# EAGLE board esc_board (EAGLE 9.2.2)
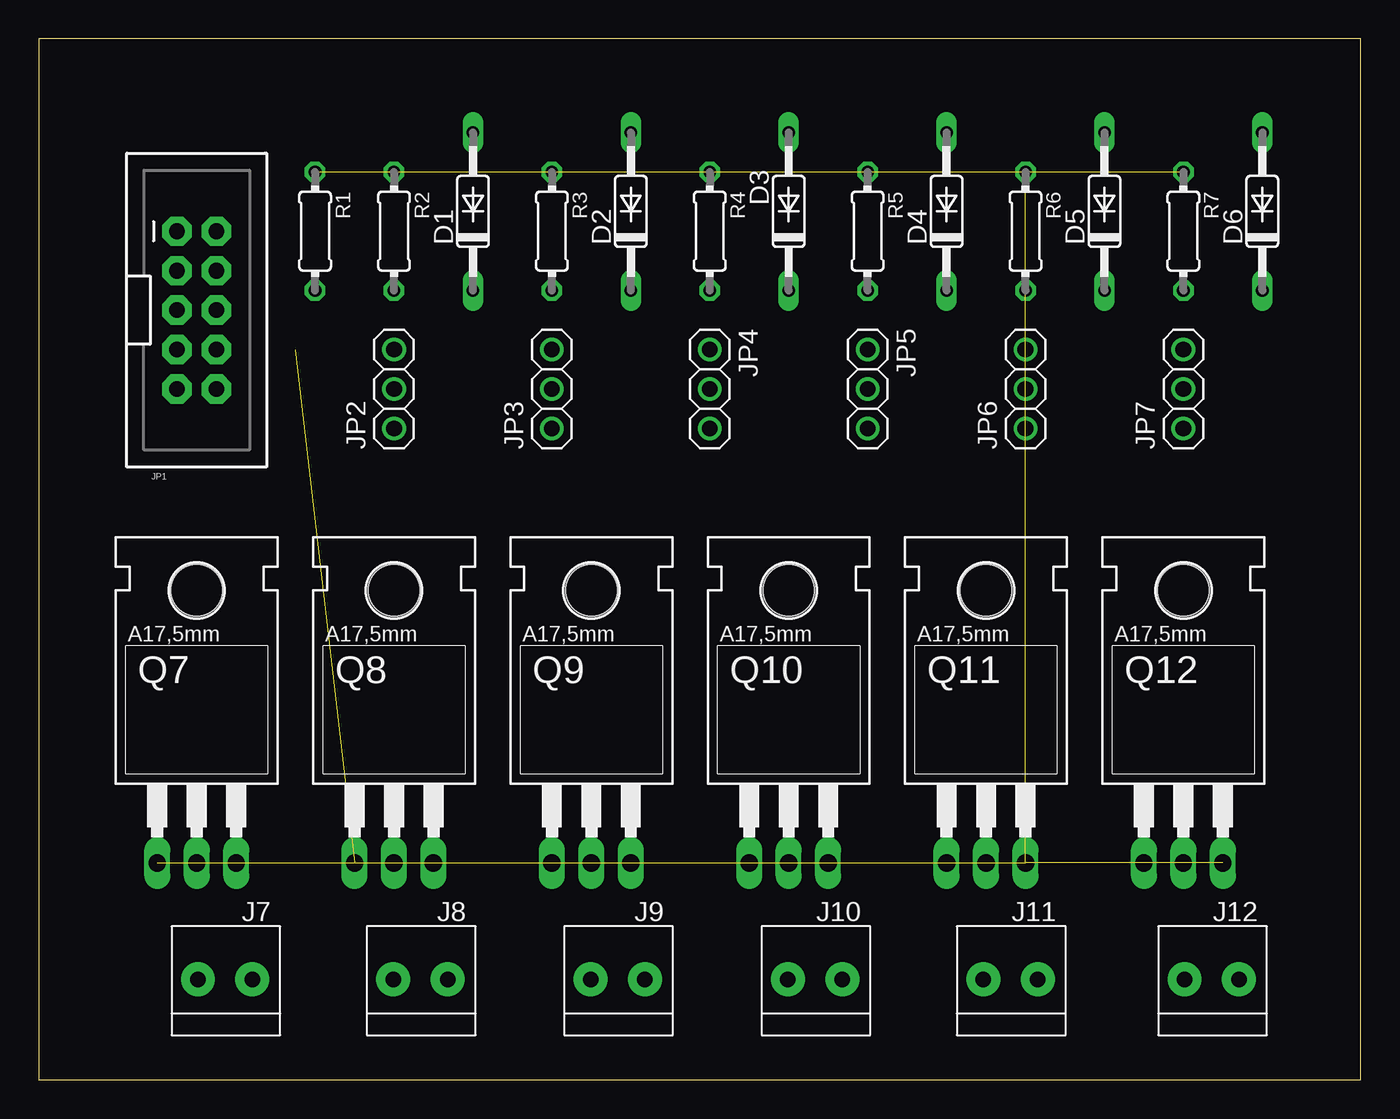
[diagram p0: board, top side]
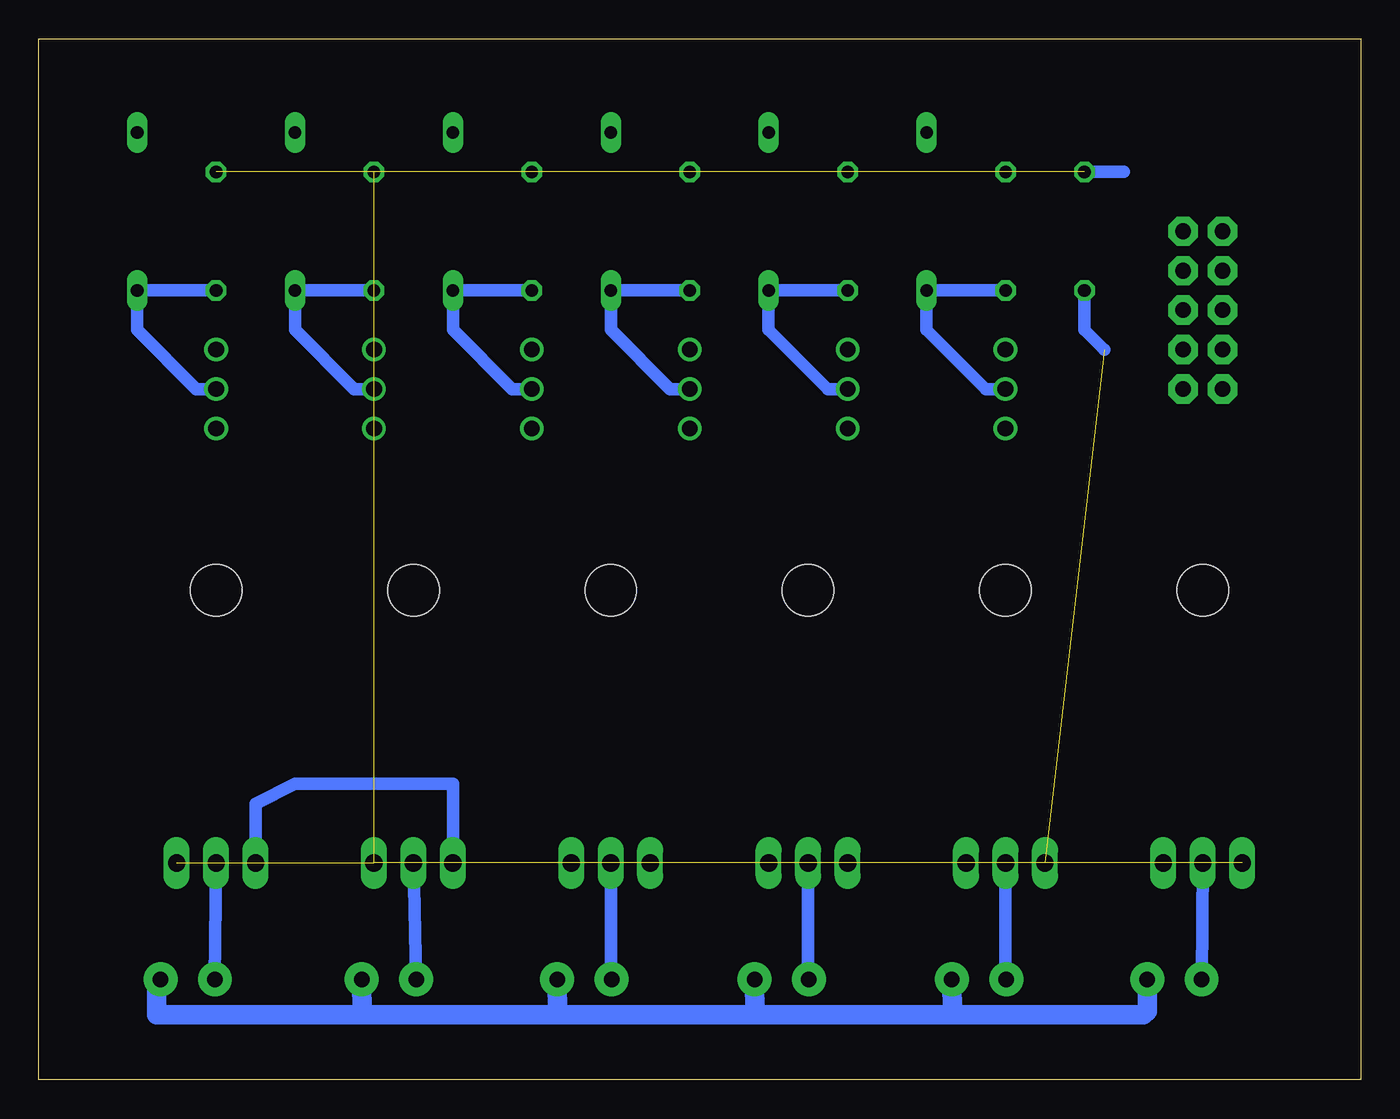
[diagram p1: board, bottom side, seen from below]

Size 85.07 x 66.98 mm. Coordinates in mm from the lower left corner, seen from the top.
Outline: 0,0 85.07,0 85.07,66.98 0,66.98 0,0
Copper layers (1*16): Top 0.035mm / dielectric 1.5mm / Bottom 0.035mm
Design rules "default": minimum track width 6mil, minimum drill 0.35mm, track to track 6mil, track to pad 6mil, pad to pad 6mil, via to via 6mil, smd to smd 6mil, copper to edge 40mil, drill to drill 6mil, minimum pad ring 10mil, minimum via ring 8mil, stop-mask expansion 4mil, vias tented up to drill 0mil, thermal gap 10mil

## Footprints (pad centres in the part's own frame; a part is rotated, then mirrored left to right if it is on the bottom)
DO35-10 = drill 0.813 long: A 5.08,0; C -5.08,0
1X2-3.5MM = drill 1 pad 2.184: 1 1.8,0; 2 -1.7,0
2X5-SHROUDED = drill 1.016 pad 1.88 octagon: 1 -1.27,5.08; 2 1.27,5.08; 3 -1.27,2.54; 4 1.27,2.54; 5 -1.27,0; 6 1.27,0; 7 -1.27,-2.54; 8 1.27,-2.54; 9 -1.27,-5.08; 10 1.27,-5.08
1X03 = drill 1.016: 1 -2.54,0; 2 0,0; 3 2.54,0
TO220BH = drill 1.118 long: D 0,-6.35; G -2.54,-6.35; S 2.54,-6.35 | hole 3.302: 0,11.176
0204/7 = drill 0.813 octagon: 1 -3.81,0; 2 3.81,0

## Placement (x,y rotation side)
D1  1N4148DO35-10  [DO35-10]  27.94,55.88 90 top
D2  1N4148DO35-10  [DO35-10]  38.1,55.88 90 top
D3  1N4148DO35-10  [DO35-10]  48.26,55.88 90 top
D4  1N4148DO35-10  [DO35-10]  58.42,55.88 90 top
D5  1N4148DO35-10  [DO35-10]  68.58,55.88 90 top
D6  1N4148DO35-10  [DO35-10]  78.74,55.88 90 top
J7  1X2-3.5MM  [1X2-3.5MM]  11.94,6.48 0 top
J8  1X2-3.5MM  [1X2-3.5MM]  24.51,6.48 0 top
J9  1X2-3.5MM  [1X2-3.5MM]  37.21,6.48 0 top
J10  1X2-3.5MM  [1X2-3.5MM]  49.91,6.48 0 top
J11  1X2-3.5MM  [1X2-3.5MM]  62.48,6.48 0 top
J12  1X2-3.5MM  [1X2-3.5MM]  75.44,6.48 0 top
JP1  M05X2SHD  [2X5-SHROUDED]  10.16,49.53 0 top
JP2  [1X03]  22.86,44.45 90 top
JP3  [1X03]  33.02,44.45 90 top
JP4  [1X03]  43.18,44.45 270 top
JP5  [1X03]  53.34,44.45 270 top
JP6  [1X03]  63.5,44.45 90 top
JP7  [1X03]  73.66,44.45 90 top
Q7  BUZ11BH  [TO220BH]  10.16,20.32 0 top
Q8  BUZ11BH  [TO220BH]  22.86,20.32 0 top
Q9  BUZ11BH  [TO220BH]  35.56,20.32 0 top
Q10  BUZ11BH  [TO220BH]  48.26,20.32 0 top
Q11  BUZ11BH  [TO220BH]  60.96,20.32 0 top
Q12  BUZ11BH  [TO220BH]  73.66,20.32 0 top
R1  [0204/7]  17.78,54.61 270 top
R2  [0204/7]  22.86,54.61 270 top
R3  [0204/7]  33.02,54.61 270 top
R4  [0204/7]  43.18,54.61 270 top
R5  [0204/7]  53.34,54.61 270 top
R6  [0204/7]  63.5,54.61 270 top
R7  [0204/7]  73.66,54.61 270 top

## Library data of the parts
D1-D6 = diode
J7-J12 JP2-JP7 = adafruit
JP1 = SparkFun-Connectors
Q7-Q12 = transistor-power
R1-R7 = rcl; SPICEPREFIX: R

## Nets
E16.8V: J7.1 J8.1 J9.1 J10.1 J11.1 J12.1
EN: Q7.G Q8.G Q9.G Q10.G Q11.G Q12.G R1.2
GNDE: Q7.S Q8.S Q9.S Q10.S Q11.S Q12.S R1.1 R2.1 R3.1 R4.1 R5.1 R6.1 R7.1
N$2: J7.2 Q7.D
N$3: D1.C JP2.2 R2.2
N$5: J8.2 Q8.D
N$6: D2.C JP3.2 R3.2
N$8: J9.2 Q9.D
N$9: D3.C JP4.2 R4.2
N$11: J10.2 Q10.D
N$12: D4.C JP5.2 R5.2
N$14: J11.2 Q11.D
N$15: D5.C JP6.2 R6.2
N$16: D6.C JP7.2 R7.2
N$17: J12.2 Q12.D

## Tracks (layer width: path | path; a pad name or v marks a point on that pad's centre or on a via)
E16.8V
  Bottom 1.27: J7.1 13.74,4.42 13.97,4.19 26.29,4.19 | 26.29,4.19 38.99,4.19 | 38.99,4.19 51.69,4.19 | 51.69,4.19 64.26,4.19 | 64.26,4.19 77.47,4.19 77.47,6.35 J12.1 | J11.1 64.26,4.19 | J10.1 51.69,4.19 | J9.1 38.99,4.19 | J8.1 26.29,4.19
EN  (5 unrouted)
  Bottom 0.813: Q11.G 58.42,19.05 68.58,19.05 71.12,17.78 Q12.G | 16.51,46.99 17.78,48.26 R1.2
GNDE  (12 unrouted)
  Bottom 0.813: 15.24,58.42 R1.1
N$2
  Bottom 0.813: Q7.D J7.2
N$3
  Bottom 0.813: JP2.2 24.13,44.45 27.94,48.26 D1.C R2.2
N$5
  Bottom 0.813: Q8.D 22.86,6.35 J8.2
N$6
  Bottom 0.813: JP3.2 34.29,44.45 38.1,48.26 D2.C R3.2
N$8
  Bottom 0.813: Q9.D 35.56,6.35 J9.2
N$9
  Bottom 0.813: JP4.2 44.45,44.45 48.26,48.26 D3.C R4.2
N$11
  Bottom 0.813: Q10.D 48.26,6.35 J10.2
N$12
  Bottom 0.813: JP5.2 54.61,44.45 58.42,48.26 D4.C R5.2
N$14
  Bottom 0.813: Q11.D J11.2
N$15
  Bottom 0.813: JP6.2 64.77,44.45 68.58,48.26 D5.C R6.2
N$16
  Bottom 0.813: JP7.2 74.93,44.45 78.74,48.26 D6.C R7.2
N$17
  Bottom 0.813: Q12.D J12.2